# Altium PCB Pit-RFD.PcbDoc
Units mil, origin at the board's own origin, x right, y up, seen from the top; angles counter-clockwise.
Board outline 2559.06 x 2224.41 mil, 2 copper layers (Top Layer, Bottom Layer); 2 components, 5 nets, 63 pads, 0 vias.
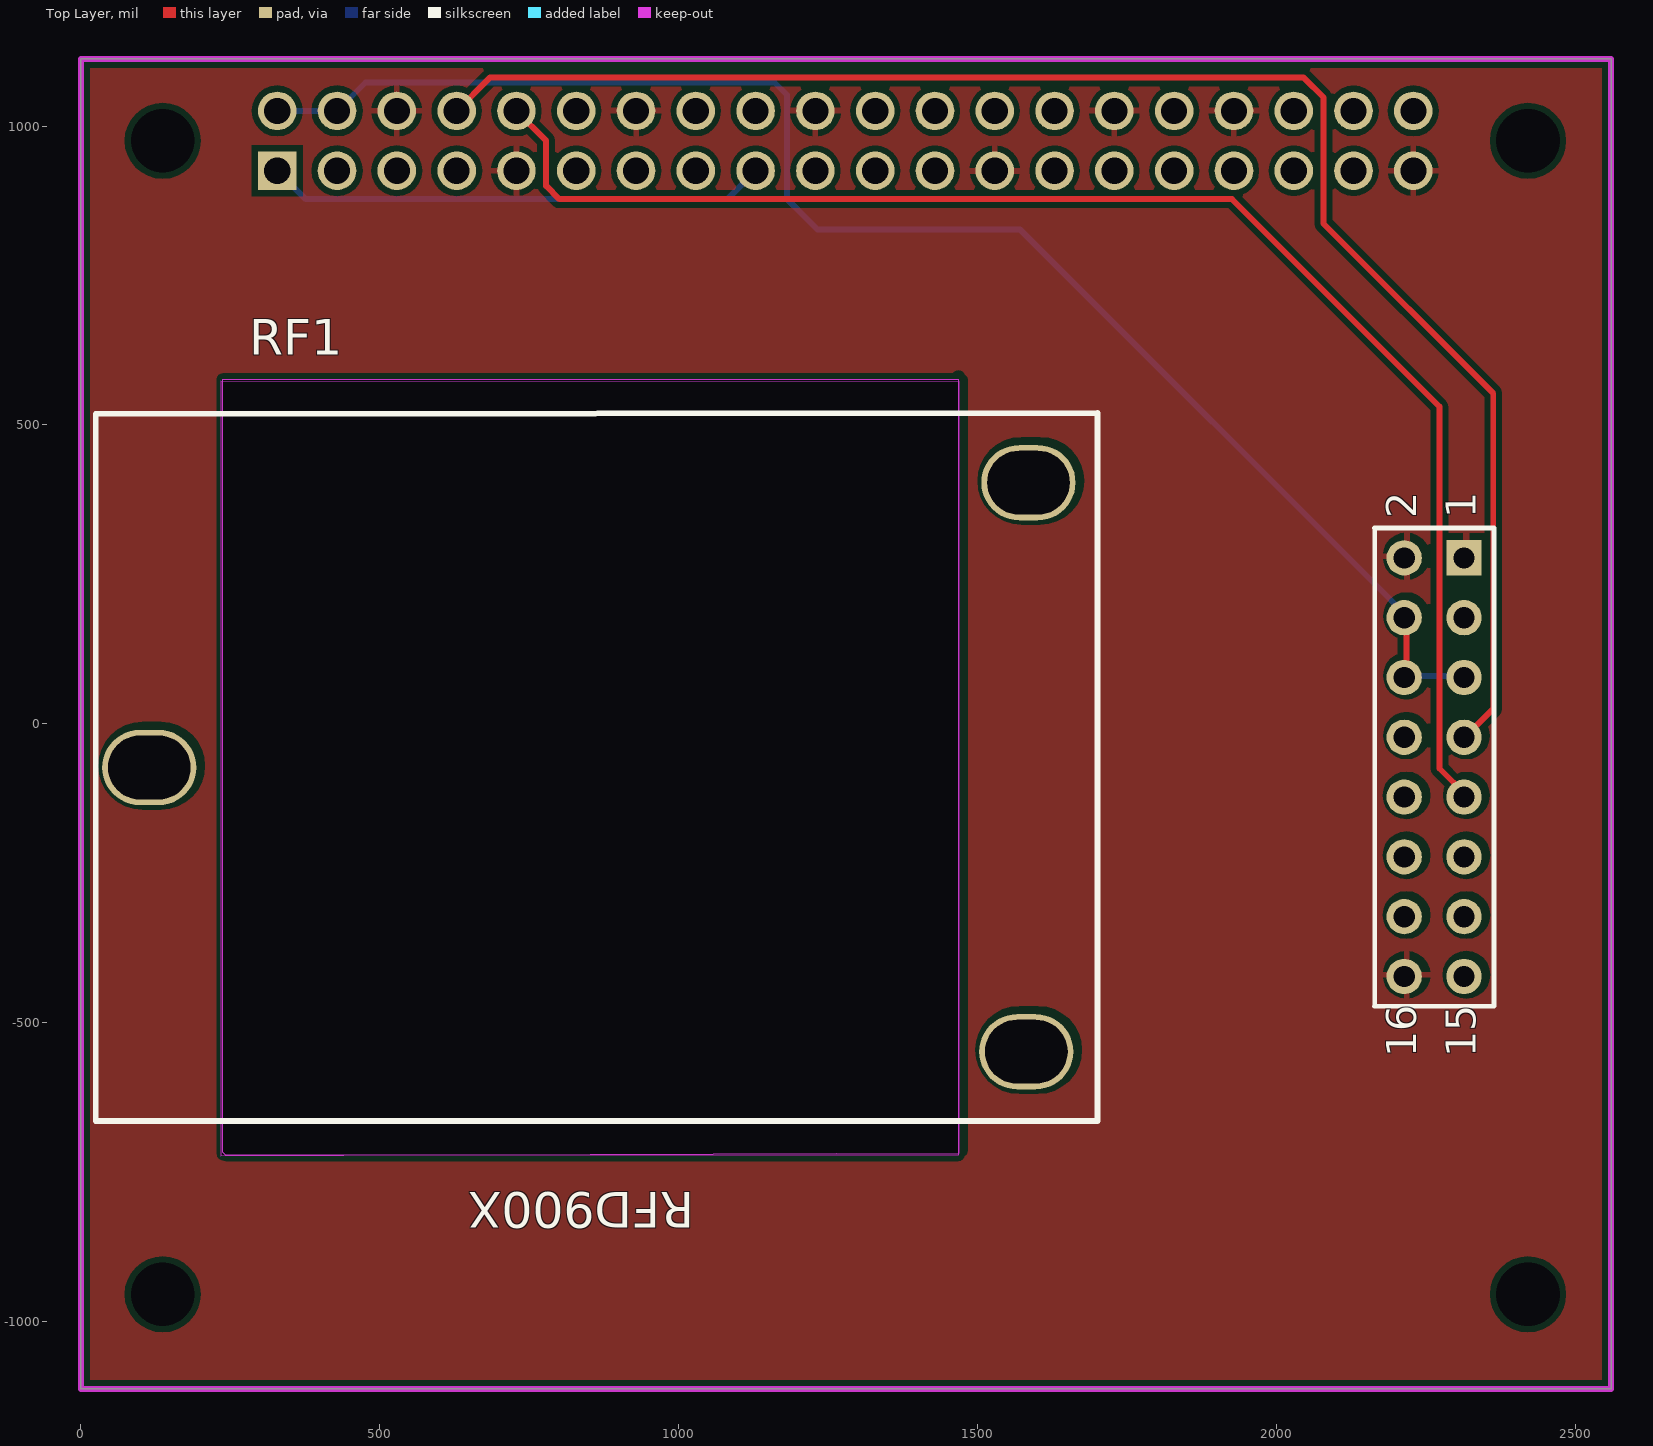
[diagram p0: Top Layer view]
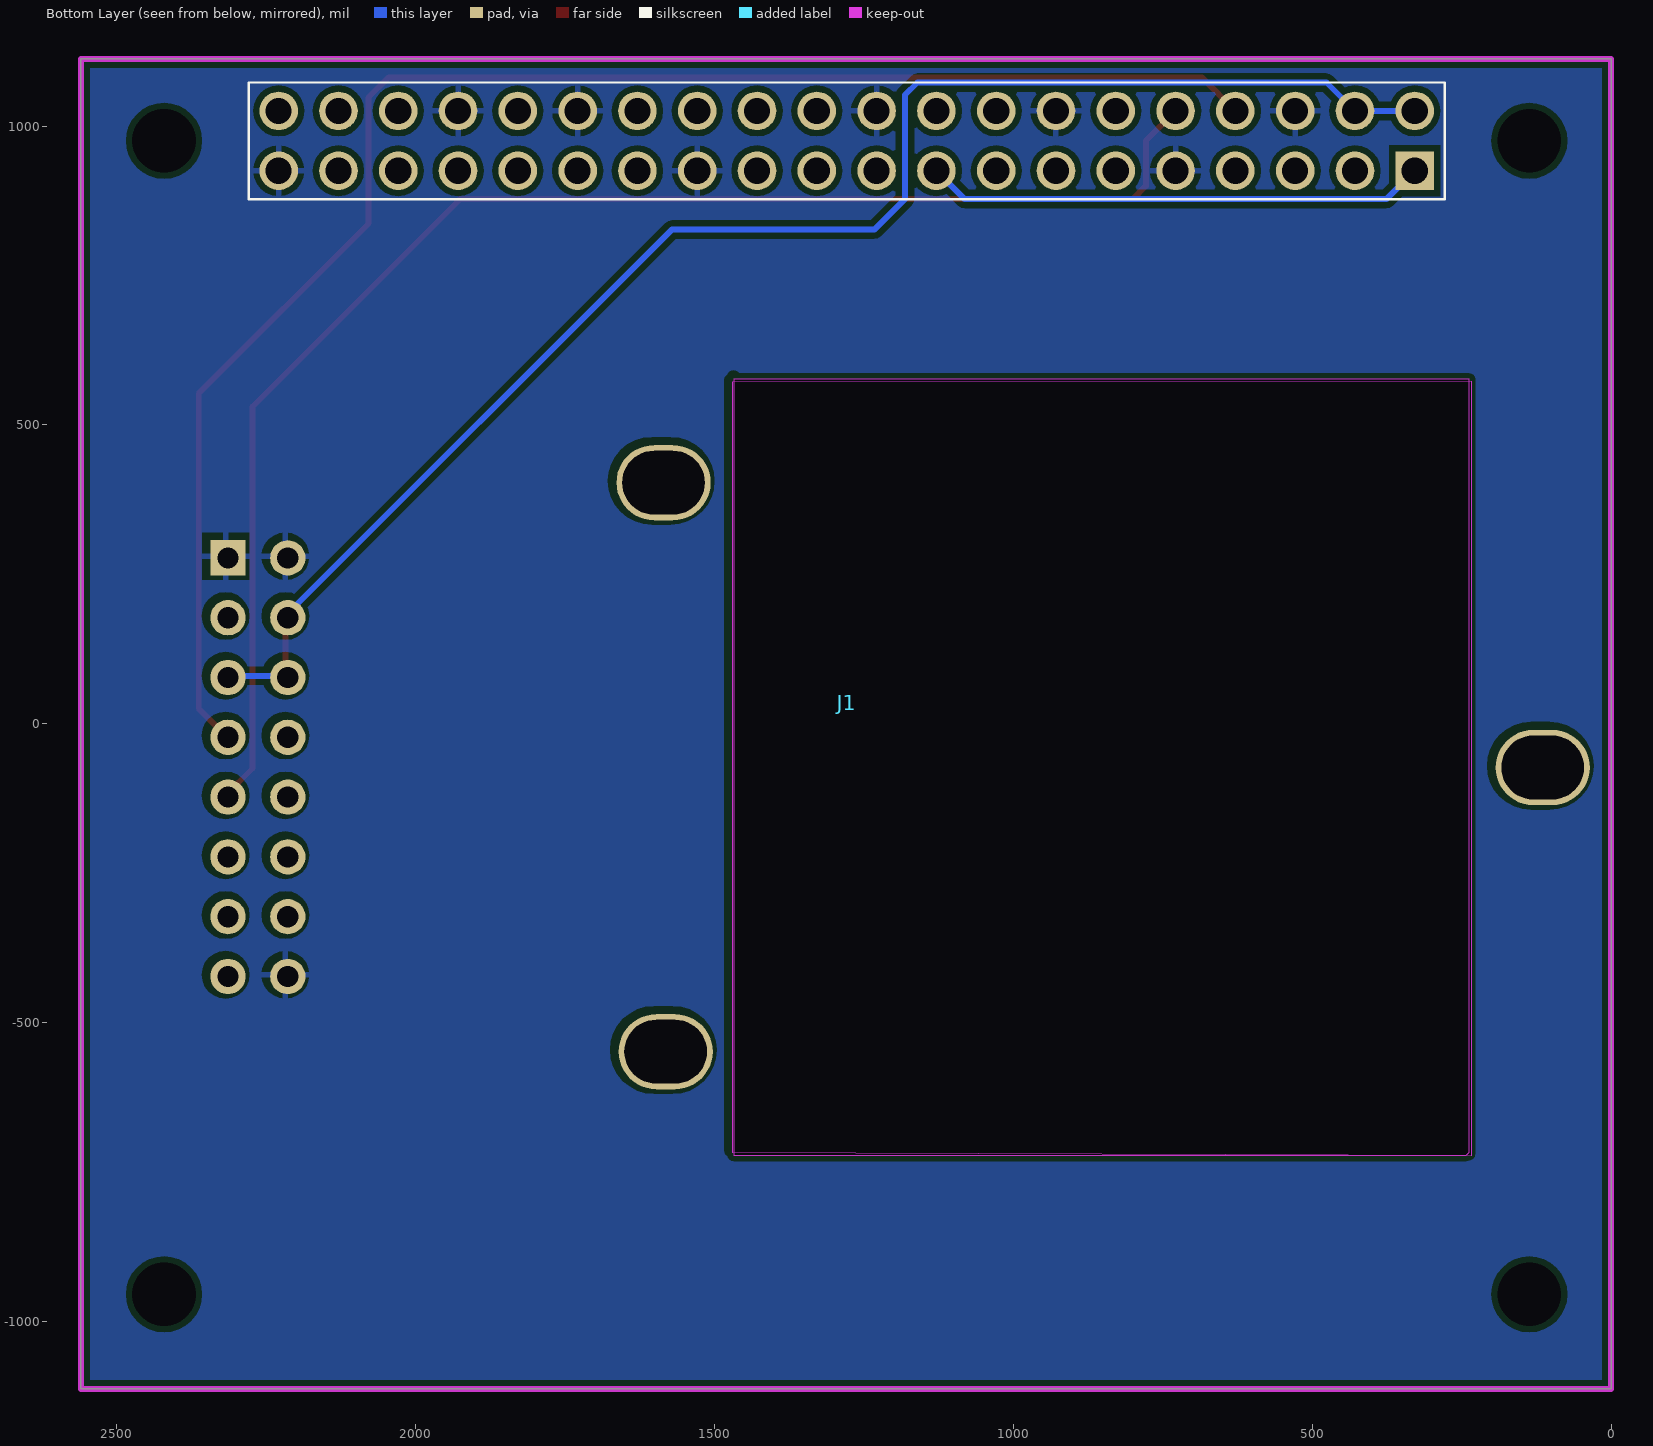
[diagram p1: Bottom Layer view, seen from below]

## Layer stack, top to bottom
Top Solder: solder mask 0.4, Solder Resist, Dk 3.5
Top Layer: signal copper 1.4
Dielectric 1: dielectric 12.6, FR-4, Dk 4.8
Bottom Layer: signal copper 1.4
Bottom Solder: solder mask 0.4, Solder Resist, Dk 3.5

## Board outline
0,-1112.2 2559.06,-1112.2 2559.06,1112.2 0,1112.2
cut-out: 242.56,-720.88 237.56,-715.89 237.56,576.65 1467.56,576.65 1467.56,-720.88

## Design rules (kind name [scope] priority, off if disabled: settings)
Clearance [All] p1: gap=10 ignorepadtopadclearanceinfootprint=FALSE except(0: Arc-Hole Track-Hole SMDPad-Hole THPad-Hole Via-Hole Fill-Hole Poly-Hole Region-Hole Text-Hole)
PolygonConnect [All] p1: connectstyle=Relief reliefconductorwidth=10 reliefentries=4 polygonreliefangle="90 Angle" airgapwidth=10
RoutingVias [All] p1: holewidth=28 width=50 viastyle="Through Hole" minholewidth=28 minwidth=50 maxholewidth=28 maxwidth=50
SolderMaskExpansion [All] p1: expansion=4
Width [All] p1: maxlimit=10 minlimit=10 preferedwidth=10
30 further rules are at their usual default settings.

## Components (designator, comment, footprint, x,y, rotation, side; value= is the part's Value field where it differs from the comment)
J1 "RASPBERRY_PI_4B_+_Samtec_ESP-120-33-G-D" RASPBERRYPI4B4GB 328.35,925.2 r180 bottom
RF1 "RFD900x" RFD900X_HS_U 1698.82,-662.28 r270 top

## Footprints (in the part's own frame and the unit in brackets; to place one, negate y for a bottom-side part, rotate by r counter-clockwise, add the part's x,y. Pads: shape width x height; smd on the part's side, far side on the other; paste and mask are expansions set on the pad)
RASPBERRYPI4B4GB [mm]
  rect 1.64x1.64 hole 1.11: 1(0,0)
  round 1.64 hole 1.11: 2(0,2.54) 3(-2.54,0) 4(-2.54,2.54) 5(-5.08,0) 6(-5.08,2.54) 7(-7.62,0) 8(-7.62,2.54) 9(-10.16,0) 10(-10.16,2.54) 11(-12.7,0) 12(-12.7,2.54) 13(-15.24,0) 14(-15.24,2.54) 15(-17.78,0) 16(-17.78,2.54) 17(-20.32,0) 18(-20.32,2.54) 19(-22.86,0) 20(-22.86,2.54) 21(-25.4,0) 22(-25.4,2.54) 23(-27.94,0) 24(-27.94,2.54) 25(-30.48,0) 26(-30.48,2.54) 27(-33.02,0) 28(-33.02,2.54) 29(-35.56,0) 30(-35.56,2.54) 31(-38.1,0) 32(-38.1,2.54) 33(-40.64,0) 34(-40.64,2.54) 35(-43.18,0) 36(-43.18,2.54) 37(-45.72,0) 38(-45.72,2.54) 39(-48.26,0) 40(-48.26,2.54)
  round 1.35 hole 2.7 unplated: 41(4.87,1.27) 42(-53.13,1.27) 43(-53.13,-47.73) 44(4.87,-47.73)
  silkscreen extent -49.53,-1.2 1.27,3.74, body extent -80.63,-53.62 8.36,4.78, height 22.43
RFD900X_HS_U [mm] "Heatsink Up"
  rect 1.5x1.5 hole 0.9: 1(-23.875,15.602)
  round 1.5 hole 0.9: 2(-23.875,13.062) 3(-21.335,15.602) 4(-21.335,13.062) 5(-18.795,15.602) 6(-18.795,13.062) 7(-16.255,15.602) 8(-16.255,13.062) 9(-13.715,15.602) 10(-13.715,13.062) 11(-11.175,15.602) 12(-11.175,13.062) 13(-8.635,15.602) 14(-8.635,13.062) 15(-6.095,15.602) 16(-6.095,13.062)
  oval 3.2x4 hole 3.5 slot 2.7 at 0 deg: ""(-27.072,-2.9) ""(-14.972,-40.245) ""(-2.9,-2.99)
  Keep-Out Layer board cut-out: 1.387,-5.842 -31.368,-5.842 -31.369,-37.211 1.529,-37.211
  silkscreen extent -30.03,-42.52 0.04,16.87, body extent -29.99,-53.34 0.15,-8, height 7.5

## Part data
J1: "Connector", Arrow Part Number="RASPBERRY PI 4B + Samtec ESP-120-33-G-D", Manufacturer_Name=RASPBERRY-PI, Datasheet Link=https://www.raspberrypi.org/documentation/hardware/raspberrypi/mechanical/rpi_MECH_4b_4p0.pdf, Height=24.3mm, Manufacturer_Part_Number="RASPBERRY PI 4B + Samtec ESP-120-33-G-D"

## Nets (pads, with @x,y where several pads share a name; then routed paths per layer and width w, separated by ;. In a path a pad name is that pad's centre, name@x,y a point inside that pad or via, vN(x,y) a via of type N, cw(c..) or ccw(c..) an arc to the next point about the centre after c; other vN are vias at no path point)
+5: J1.2 J1.4 RF1.4 RF1.5 RF1.6 | length 2579.9
  Top Layer w10: RF1.6@2217.01,80.53 RF1.4@2217.01,180.53
  Bottom Layer w10: J1.2 J1.4 475.94,1072.8 1160,1072.8 1181,1051.8 1181,877.8 1232,826.8 1570.74,826.8 RF1.4@2217.01,180.53 ; RF1.6@2217.01,80.53 RF1.5@2317.01,80.53
GND: J1.6 J1.9 J1.14 J1.20 J1.25 J1.30 J1.34 J1.39 RF1.1 RF1.2 RF1.16
UART_RX: J1.10 RF1.9 | length 2461.7
  Top Layer w10: J1.10 778,975.54 778,899.8 800,877.8 1925,877.8 2272,530.8 2272,-74.46 RF1.9@2317.01,-119.47
UART_TX: J1.8 RF1.7 | length 2689.9
  Top Layer w10: J1.8 683.94,1080.8 2045,1080.8 2078,1047.8 2078,836.8 2362,552.8 2362,25.52 RF1.7@2317.01,-19.47
VCC: J1.1 J1.17 | length 839.3
  Bottom Layer w10: J1.1 375.75,877.8 1080.94,877.8 J1.17
pads on no net: J1.3 J1.5 J1.7 J1.11 J1.12 J1.13 J1.15 J1.16 J1.18 J1.19 J1.21 J1.22 J1.23 J1.24 J1.26 J1.27 J1.28 J1.29 J1.31 J1.32 J1.33 J1.35 J1.36 J1.37 J1.38 J1.40 J1.41 J1.42 J1.43 J1.44 RF1. RF1.3 RF1.8 RF1.10 RF1.11 RF1.12 RF1.13 RF1.14 RF1.15

## Polygon pours and split planes (outlines as drawn)
GND on Top Layer "GND_L01_P000" (solid, pour order 0): 0,1112.2 2559.06,1112.2 2559.06,-1112.2 0,-1112.2
GND on Bottom Layer "GND_L02_P004" (solid, pour order 4): 0,1112.2 2559.06,1112.2 2559.06,-1112.2 0,-1112.2

## Keep-outs
Keep-Out Layer:
  the board outline again, w10

## Silkscreen, mask and mechanical layers (free items; w line width, h text height)
Mechanical 1:
  lines w78: 0,-1112.2 0,1112.2 2559.06,1112.2 2559.06,-1112.2 0,-1112.2 ; 233.82,-722.47 583.07,-720.88 1467.56,-720.88 1467.56,-716.88 1468.82,-716.88 1468.82,572.67 1467.56,572.67 1467.56,576.65 237.56,576.65 237.56,572.72 233.82,572.72 233.82,-722.47

## Text inside footprints (layer, text, board x,y; h text height)
RF1: Top Overlay "16" at 2233.07,-557.28 h50 r90; Top Overlay "15" at 2333.07,-557.28 h50 r90; Top Overlay "2" at 2233.07,344.37 h50 r90; Top Overlay "1" at 2333.07,344.37 h50 r90; Top Overlay "RFD900X" at 1026.1,-783.11 h60 r180